# EAGLE board 405_led_jetracer020000S (EAGLE 9.6.2)
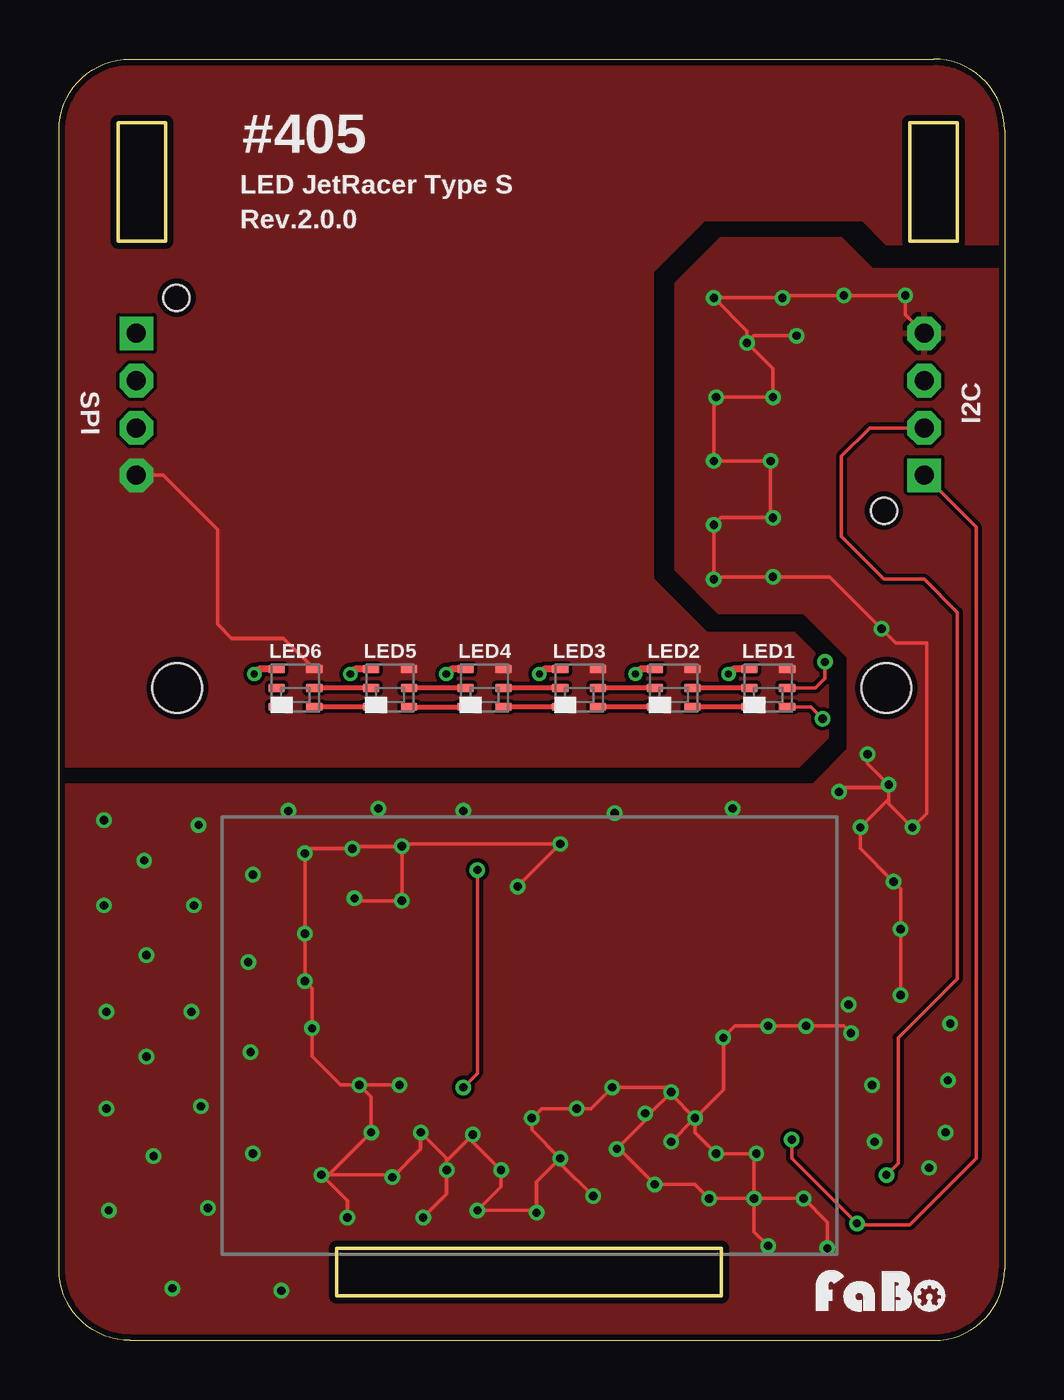
[diagram p0: board, top side]
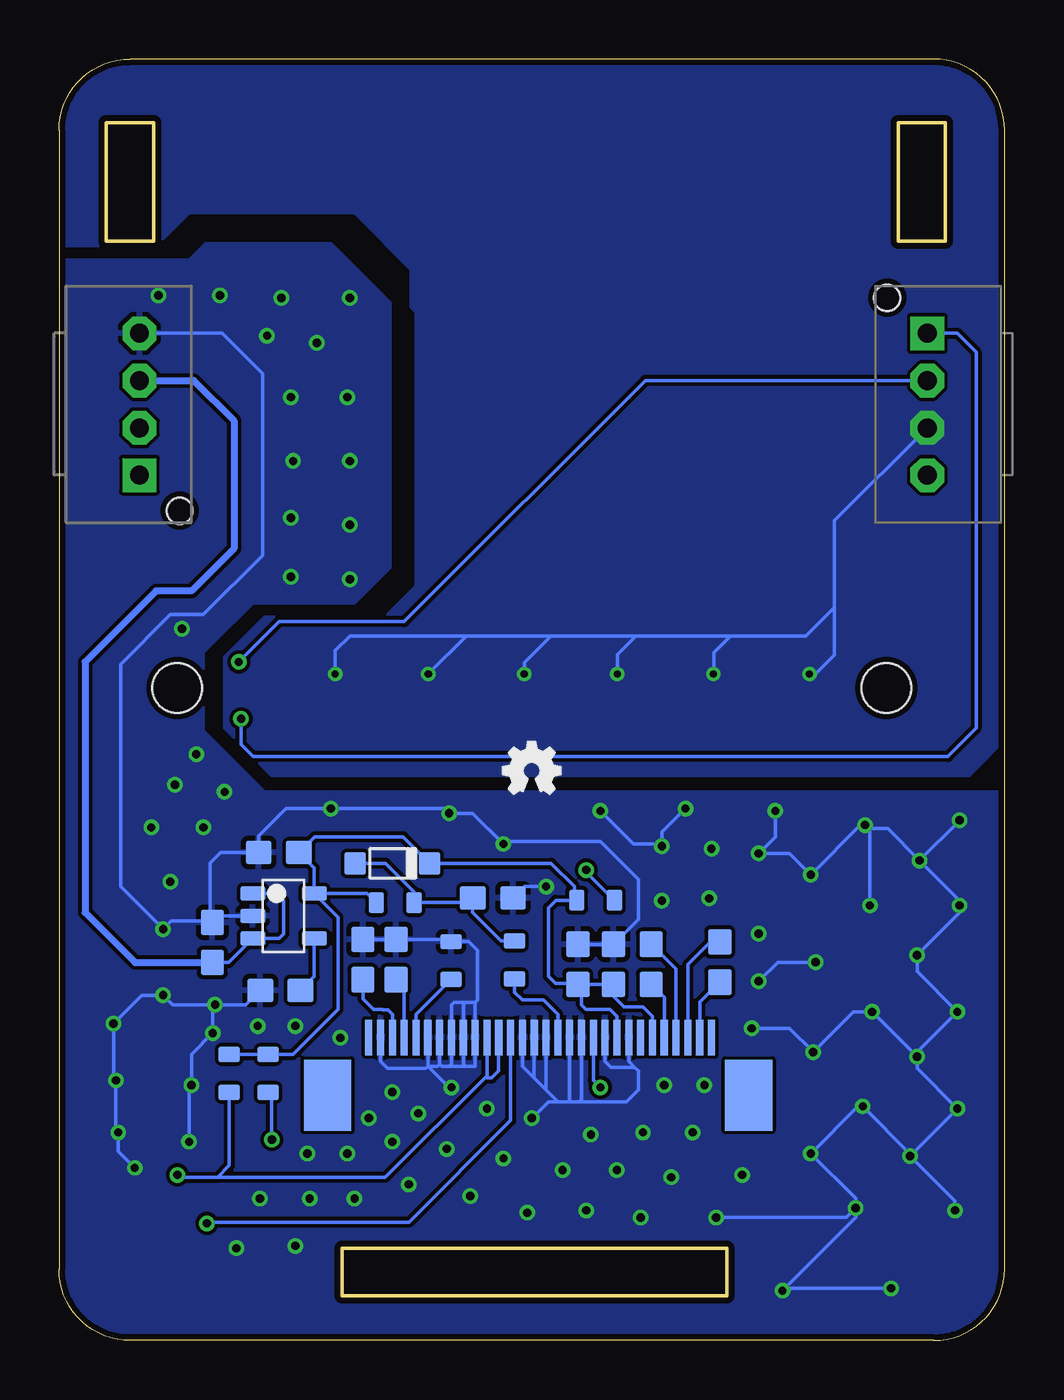
[diagram p1: board, bottom side, seen from below]

Size 40 x 54.2 mm. Coordinates in mm from the lower left corner, seen from the top.
Outline: 3,0 37,0 arc90 40,3 40,51.2 arc90 37,54.2 3,54.2 arc90 0,51.2 0,3 arc90 3,0
Outline: 11.75,1.89 28.03,1.89 28.03,3.9 11.75,3.9 11.75,1.89
Outline: 2.5,51.5 4.5,51.5 4.5,46.5 2.5,46.5 2.5,51.5
Outline: 36,51.5 38,51.5 38,46.5 36,46.5 36,51.5
Copper layers (1*16): Top 0.035mm / dielectric 1.6mm / Bottom 0.035mm
Design rules "PCBway": minimum track width 6mil, minimum drill 12mil, track to track 6mil, track to pad 6mil, pad to pad 6mil, via to via 6mil, smd to smd 6mil, copper to edge 10mil, drill to drill 10mil, minimum pad ring 10mil, minimum via ring 6mil, stop-mask expansion 2mil, vias tented up to drill 100mil, thermal gap 8mil
Holes 2.1 mm at 5,27.6 35,27.6
bRestrict: 8 lines

## Footprints (pad centres in the part's own frame; a part is rotated, then mirrored left to right if it is on the bottom)
0603 = smd 1.1 x 1: 1 -0.85,0; 2 0.85,0
1N4148W = smd 0.9 x 0.95: ANODE 0,0; CATHODE 3.15,0
FABO_BRICK_I2C_B04B-PASK-1 = drill 0.8 pad 1.422 octagon: GND -3,0; SDA 1,0; VCC -1,0 | drill 0.8 pad 1.422 square: SCL 3,0 | hole 1.1: 4.5,1.7
SOT-23-5 = smd 0.6 x 1.05: 1 -0.95,-1.3; 2 0,-1.3; 3 0.95,-1.3; 4 0.95,1.3; 5 -0.95,1.3
APA102_2020 = smd 0.7 x 0.35: CKI 0.8,0; CKO -0.8,0; GND 0.8,0.8; SDI 0.8,-0.8; SDO -0.8,-0.8; VCC -0.8,0.8
0603' = smd 0.65 x 0.9: 1 -0.8,0; 2 0.8,0
SPI-B04B-PASK-1 = drill 0.8 pad 1.422 octagon: CI 1,1.27; GND -3,1.27; VCC -1,1.27 | drill 0.8 pad 1.422 square: DI 3,1.27 | hole 1.1: 4.5,2.97
ER-CON30HT-1 = smd 0.3 x 1.5 bottom: 1 7,-0.23; 2 6.5,-0.23; 3 6,-0.23; 4 5.5,-0.23; 5 5,-0.23; 6 4.5,-0.23; 7 4,-0.23; 8 3.5,-0.23; 9 3,-0.23; 10 2.5,-0.23; 11 2,-0.23; 12 1.5,-0.23; 13 1,-0.23; 14 0.5,-0.23; 15 0,-0.23; 16 -0.5,-0.23; 17 -1,-0.23; 18 -1.5,-0.23; 19 -2,-0.23; 20 -2.5,-0.23; 21 -3,-0.23; 22 -3.5,-0.23; 23 -4,-0.23; 24 -4.5,-0.23; 25 -5,-0.23; 26 -5.5,-0.23; 27 -6,-0.23; 28 -6.5,-0.23; 29 -7,-0.23; 30 -7.5,-0.23 | smd 2 x 3 bottom: 31 -9.07,-2.67; 32 8.74,-2.67

## Placement (x,y rotation side)
C4  1uF  [0603]  14.95,15.91 90 bottom
C5  1uF  [0603]  12.05,16.01 270 bottom
C6  1uF  [0603]  18.05,15.91 270 bottom
C7  1uF  [0603]  16.55,15.91 270 bottom
C8  10uF  [0603]  27.15,16.11 270 bottom
C9  10uF  [0603]  25.75,16.11 270 bottom
C11  10uF  [0603]  21.65,18.71 180 bottom
C22  4.7uF  [0603]  30.7,20.64 0 bottom
C23  0.01uF  [0603]  30.64,14.81 0 bottom
C24  1uF  [0603]  33.52,16.84 270 bottom
D1  1N4148  [1N4148W]  27.47,20.18 0 bottom
I2C  [FABO_BRICK_I2C_B04B-PASK-1]  36.6,39.6 270 bottom
IC4  [SOT-23-5]  30.5,17.95 270 bottom
LED1  [APA102_2020]  30,27.6 0 top
LED2  [APA102_2020]  26,27.6 0 top
LED3  [APA102_2020]  22,27.6 0 top
LED4  [APA102_2020]  18,27.6 0 top
LED5  [APA102_2020]  14,27.6 0 top
LED6  [APA102_2020]  10,27.6 0 top
LOGO1  [LOGO_OSHW_S_BOTTOM]  20,24.1 0 top
LOGO2  [LOGO_FABO_S]  34.81,1.07 0 top
R7  DFN  [0603']  31.16,11.29 270 bottom
R8  100  [0603']  20.73,16.09 270 bottom
R9  DFN  [0603']  32.8,11.29 270 bottom
R22  10K  [0603']  17.3,18.62 0 bottom
R23  10K  [0603']  25.78,18.52 0 bottom
R35  390K  [0603']  23.41,16.07 90 bottom
SPI  [SPI-B04B-PASK-1]  2,39.6 90 bottom
U1  [ER-CON30HT-1]  19.9,13.04 0 top

## Library data of the parts
C4-C9 C11 C22-C24 = FaBo-Capacitor
D1 = FaBo-Diode
I2C = FaBo-Template
IC4 = FaBo-Supply
LED1-LED6 = FaBo-LED
LOGO1 LOGO2 = FaBo-Logo
R7-R9 R22 R23 R35 = FaBo-Resistors
SPI = FaBo-Connetor
U1 = FaBo-Display

## Nets
0: C6.1 C7.1 C8.1 C9.1 C11.1 C22.1 C23.1 C24.1 I2C.GND IC4.2 R35.2 U1.2 U1.6 U1.7 U1.8 U1.9 U1.10 U1.14 U1.15 U1.16 U1.18 U1.19 U1.21 U1.23
3V3: C6.2 C7.2 C22.2 D1.CATHODE IC4.5 R7.1 R9.1 R22.1 R23.1 U1.22 U1.25
5V: LED1.VCC LED2.VCC LED3.VCC LED4.VCC LED5.VCC LED6.VCC SPI.VCC
5V_I2C: C24.2 I2C.VCC IC4.1 IC4.3
CI: LED1.CKI SPI.CI
CI1: LED1.CKO LED2.CKI
CI2: LED2.CKO LED3.CKI
CI3: LED3.CKO LED4.CKI
CI4: LED4.CKO LED5.CKI
CI5: LED5.CKO LED6.CKI
DI: LED1.SDI SPI.DI
DI1: LED1.SDO LED2.SDI
DI2: LED2.SDO LED3.SDI
DI3: LED3.SDO LED4.SDI
DI4: LED4.SDO LED5.SDI
DI5: LED5.SDO LED6.SDI
GND: LED1.GND LED2.GND LED3.GND LED4.GND LED5.GND LED6.GND SPI.GND
N$2: C23.2 IC4.4
N$16: C4.2 U1.27
N$21: C4.1 U1.26
N$22: C5.1 U1.28
N$23: C5.2 U1.29
N$24: R35.1 U1.5
N$25: C9.2 U1.4
N$26: C8.2 U1.3
N$27: R8.2 U1.17
N$28: C11.2 D1.ANODE R8.1 R23.2
N$50: R22.2 U1.20
SCL: I2C.SCL R7.2 U1.13
SDA: I2C.SDA R9.2 U1.11 U1.12

## Tracks (layer width: path | path; a pad name or v marks a point on that pad's centre or on a via)
0  (via drill 0.35)
  Top 0.152: v19.4,19.2 v21.2,21 14.72,21 14.5,20.78 | v11.1,7 12.2,5.9 v12.2,5.2 | 14.5,20.78 v14.5,20.9 12.5,20.9 v12.4,20.8 10.6,20.8 v10.4,20.6 v10.4,17.2 v10.4,15.2 10.7,14.9 v10.7,13.2 10.7,12.01 11.91,10.8 v12.7,10.8 | 14.5,20.78 v14.5,18.6 12.6,18.6 v12.5,18.7 | v12.7,10.8 v14.4,10.8 | v12.7,10.8 13.2,10.3 v13.2,8.8 11.4,7 v11.1,7 | v11.1,7 14,7 v14.1,6.9 15.3,8.1 v15.3,8.8 16.4,7.7 v16.4,7.2 | v16.4,7.2 16.4,6.2 v15.4,5.2 | v16.4,7.2 16.4,7.6 v17.5,8.7 17.5,8.4 v18.7,7.2 18.7,6.5 v17.7,5.5 20.1,5.5 v20.2,5.4 20.2,6.7 v21.2,7.7 | v21.2,7.7 20,8.9 v20,9.4 20.4,9.8 v21.9,9.8 22.5,9.8 v23.4,10.7 25.7,10.7 v25.9,10.5 | v21.2,7.7 21.2,7.5 v22.6,6.1 | v25.9,10.5 25,9.6 v24.8,9.6 24.8,9.3 v23.6,8.1 23.7,8.1 v25.2,6.6 26.9,6.6 v27.5,6 v29.4,6 | v29.4,6 v31.5,6 32.5,5 v32.5,3.9 | v30,4 29.4,4.6 v29.4,6 | v29.4,6 29.4,7.8 v29.5,7.9 v27.8,7.9 26.9,8.8 26.9,9.3 | 26.9,9.3 v26.9,9.4 | v26.9,9.4 25.9,10.4 v25.9,10.5 | v25.9,8.4 26.8,9.3 26.9,9.3 | v26.9,9.4 28.1,10.6 v28.1,12.8 28.6,13.3 v30,13.3 v31.6,13.3 33.2,13.3 v33.5,13 | v35.6,14.6 v35.6,17.4 35.6,19.1 v35.3,19.4 33.9,20.8 v33.9,21.7 35.1,22.9 | I2C.GND 35.8,43.4 v35.8,44.2 v33.2,44.2 30.7,44.2 v30.6,44.1 v27.7,44.1 29.1,42.7 v29.1,42.2 | v29.1,42.2 29.4,42.5 v31.2,42.5 | v29.1,42.2 30.2,41.1 v30.2,39.9 v27.8,39.9 27.7,39.8 v27.7,37.2 v30.1,37.2 30.1,34.9 v30.2,34.8 28,34.8 v27.7,34.5 v27.7,32.2 27.8,32.3 v30.2,32.3 32.6,32.3 v34.8,30.1 35.4,29.5 36.7,29.5 36.7,22.3 v36.1,21.7 35.1,22.7 35.1,22.9 | 35.1,23.4 v35.1,23.5 34.2,24.4 v34.2,24.8 | 35.1,23.4 35.1,22.9 | v33,23.2 33.2,23.4 35.1,23.4
  Bottom 0.152: C6.1 C7.1 15.5,17.81 15.5,19.5 17.1,21.1 21.1,21.1 v21.2,21 22.5,22.3 v23.5,22.3 23.7,22.5 v28.5,22.5 30.4,22.5 31.55,21.34 C22.1 33.16,20.64 33.6,20.2 33.6,18.2 33.3,17.9 | 22.4,14.3 22.3,14.4 22.3,16.5 22.67,16.87 R35.2 23.5,16.96 C9.1 C8.1 27.25,17.06 27.4,17.06 | 22.4,14.3 U1.10 22.4,11.6 22.8,11.6 | 22.8,14.3 22.9,14.2 U1.9 22.9,11.7 22.8,11.6 | 22.8,14.3 22.4,14.3 | 22.8,14.3 23.3,14.3 23.4,14.2 U1.8 23.4,11.7 23.5,11.6 | U1.7 23.9,11.7 | 23.9,11.7 23.8,11.6 23.5,11.6 | U1.6 24.4,11.6 | 24.4,11.6 24,11.6 23.9,11.7 | v19.4,19.2 20.31,19.2 C11.1 | 23.5,11.6 22.8,11.6 | U1.23 15.9,11.8 15.65,11.55 | 15.65,11.55 15.5,11.4 15.5,10.6 16,10.1 18,10.1 | 18,10.1 18.4,10.1 | 19.9,11.1 U1.15 | U1.18 18.4,10.1 | U1.19 17.9,10.2 18,10.1 | U1.21 16.9,11.8 16.65,11.55 15.65,11.55 | IC4.2 33.24,17.95 33.3,17.9 | 33.3,17.9 33.45,17.75 | 33.45,17.75 C24.1 | C23.1 32.1,14.2 v33.4,14.2 33.5,14.2 | 18.4,10.1 18.9,10.1 | 18.9,10.1 19.4,10.6 | 19.4,10.6 19.9,11.1 | U1.16 19.4,10.6 | 19.9,11.1 20.4,11.6 U1.14 | 24.4,11.6 23.5,10.7 v23.4,10.7 | 18.9,10.1 19.3,10.1 v20,9.4 | U1.2 26.4,11.8 26.1,11.5 24.5,11.5 24.4,11.6 | 33.5,14.2 35.2,14.2 v35.6,14.6 36.5,14.6 v37.7,13.4 37.7,11.1 v37.6,11 37.6,8.9 v37.5,8.8 37.5,8 v36.8,7.3 | 33.45,17.75 35.25,17.75 v35.6,17.4 37.4,19.2 37.4,28.6 35.3,30.7 33.9,30.7 31.4,33.2 31.4,40.9 33.1,42.6 I2C.GND | v34.5,8.4 34.5,10.7 v34.4,10.8 34.4,12.1 v33.5,13 33.5,14.2 | v4.8,2.2 9.3,2.2 v9.4,2.1 6.3,5.2 v6.3,5.6 | v12.2,5.2 6.7,5.2 v6.3,5.6 | v6.3,5.6 6.3,6 v8.2,7.9 6.2,9.9 v6,9.9 4,7.9 | 4,7.9 v4,7.8 2.1,5.9 v2.1,5.5 | 4,7.9 3.9,7.9 v2,9.8 3.7,11.5 v3.7,12 | v3.7,12 3.7,12.2 v2,13.9 3.7,15.6 v3.7,16.3 1.9,18.1 v1.9,18.4 1.9,18.6 v3.6,20.3
  Bottom 0.152: v3.6,20.3 v1.9,22 | v3.7,12 v5.6,13.9 6.4,13.9 v8.1,12.2 9.1,13.2 v10.7,13.2 | v8,16 9.6,16 v10.4,15.2 | v5.7,18.4 5.7,21.6 5.75,21.65 | 5.75,21.65 v5.9,21.8 6.1,21.8 v8.2,19.7 9.1,20.6 v10.4,20.6 9.7,21.3 v9.7,22.4 | v3.6,20.3 4.95,21.65 5.75,21.65 | v13.5,22.5 14.5,21.5 14.5,21 | 14.5,21 v14.5,20.9 | v17.1,22.4 15.7,21 14.5,21
  pour Bottom: -4,1.9 -4,20.3 -1.1,23.2 31.3,23.2 33.9,25.8 33.9,29.1 33.5,29.5 31.8,31.2 27.5,31.2 26,32.7 26,43.7 26,43.9 28.5,46.4 33.8,46.4 34.5,45.7 40.5,45.7 40.6,45.6 41.7,44.5 41.7,0.4 38.3,-3 -0.9,-3 -4,0.1
  pour Top: -6.4,22.3 -5.2,23.5 31.9,23.5 33.4,25 33.4,28.9 31.5,30.8 27.9,30.8 26.1,32.6 26.1,44.7 28,46.6 33.1,46.6 34.4,45.3 42.1,45.3 43.4,44 43.4,2.4 39.2,-1.8 -3.9,-1.8 -6.4,0.7
3V3
  Bottom 0.152: U1.25 14.9,13.7 15.3,14.1 16.1,14.1 16.55,14.55 C7.2 17.9,15.06 | 17.9,15.06 C6.2 18.09,15.1 19,15.1 19.3,15.4 19.3,18.3 18.98,18.62 18.2,18.62 | U1.22 16.4,13.7 16.7,14 17.7,14 17.9,14.2 17.9,15.06 | 18.2,18.62 R22.1 | 18.2,18.62 18.2,19.2 19.18,20.18 D1.CATHODE 25.44,21.3 29.19,21.3 C22.2 29.2,19.98 IC4.5 | R23.1 26.96,18.91 IC4.5 | R9.1 R7.1 30.11,12.1 28.2,14 28.2,17.9 IC4.5
5V  (via drill 0.3)
  Top 0.305: LED1.VCC 28.53,28.4 v28.32,28.19 | LED2.VCC 24.6,28.4 v24.38,28.19 | LED3.VCC 20.53,28.4 v20.32,28.19 | LED4.VCC 16.59,28.4 v16.38,28.19 | LED5.VCC 12.53,28.4 v12.32,28.19 | LED6.VCC 8.47,28.4 v8.26,28.19
  Bottom 0.152: SPI.VCC 7.2,34.67 7.2,31 | 7.2,31 7.2,29 8.01,28.19 v8.26,28.19 | v12.32,28.19 12.3,28.21 12.3,29.1 11.6,29.8 | 7.2,31 8.4,29.8 11.6,29.8 | v16.38,28.19 16.38,29.02 15.6,29.8 | 15.6,29.8 11.6,29.8 | v20.32,28.19 20.32,28.68 19.2,29.8 | 19.2,29.8 15.6,29.8 | v24.38,28.19 22.77,29.8 | 22.77,29.8 19.2,29.8 | v28.32,28.19 28.32,29.18 27.7,29.8 22.77,29.8
  pour Bottom (no thermals): -2.7,53.6 2.1,58.4 39.6,58.4 41.7,56.3 41.7,47.2 40.8,46.3 37.5,46.3 35.9,46.3 34.5,47.7 27.5,47.7 27.4,47.6 25.1,45.3 25.1,43.7 24.9,43.5 24.9,31.9 26.2,30.6 27.4,30.6 31.3,30.6 33,28.9 33,25.9 31,23.9 1.5,23.9 -0.2,25.6 -2.7,28.1
5V_I2C
  Bottom 0.152: IC4.1 30.8,18.9 30.5,18.6 30.5,17.2 30.7,17 IC4.3 32.83,15.98 C24.2
  Bottom 0.305: I2C.VCC 34.3,40.6 32.6,38.9 32.6,33.5 34.4,31.7 35.9,31.7 38.9,28.7 38.9,18.1 36.78,15.98 C24.2
CI  (via drill 0.35)
  Top 0.152: v32.4,28.7 32.4,28 32,27.6 LED1.CKI
  Bottom 0.152: SPI.CI 15.2,40.6 25.4,30.4 30.7,30.4 v32.4,28.7
CI1
  Top 0.203: LED1.CKO LED2.CKI
CI2
  Top 0.203: LED2.CKO LED3.CKI
CI3
  Top 0.203: LED3.CKO LED4.CKI
CI4
  Top 0.203: LED4.CKO LED5.CKI
CI5
  Top 0.203: LED5.CKO LED6.CKI
DI  (via drill 0.35)
  Top 0.152: v32.3,26.3 31.8,26.8 LED1.SDI
  Bottom 0.152: SPI.DI 2,42.6 1.2,41.8 1.2,25.9 2.4,24.7 31.8,24.7 32.3,25.2 v32.3,26.3
DI1
  Top 0.203: LED1.SDO LED2.SDI
DI2
  Top 0.203: LED2.SDO LED3.SDI
DI3
  Top 0.203: LED3.SDO LED4.SDI
DI4
  Top 0.203: LED5.SDI LED4.SDO
DI5
  Top 0.203: LED5.SDO LED6.SDI
GND
  Top 0.152: SPI.GND 4.4,36.6 6.7,34.3 6.7,30.3 7.3,29.7 9.5,29.7 LED6.GND
  pour Top (no thermals): -4.7,56.7 -2.8,58.6 39.4,58.6 43.4,54.6 43.4,48.3 41.5,46.4 35,46.4 34,47.4 27.3,47.4 25.1,45.2 25.1,32.2 27.4,29.9 31.1,29.9 32.5,28.5 32.5,25.5 31.3,24.3 -3.3,24.3 -4.7,25.7
N$2
  Bottom 0.152: C23.2 29.2,15.39 IC4.4
N$16
  Bottom 0.152: U1.27 13.9,15.71 C4.2
N$21
  Bottom 0.152: U1.26 14.4,14.51 C4.1
N$22
  Bottom 0.152: U1.28 13.4,15.9 12.44,16.86 C5.1
N$23
  Bottom 0.152: C5.2 12.9,14.31 U1.29
N$24
  Bottom 0.152: R35.1 24.9,13.79 U1.5
N$25
  Bottom 0.152: U1.4 25.4,14.91 C9.2
N$26
  Bottom 0.152: U1.3 25.9,13.8 26.08,13.98 26.29,13.98 26.3,14 26.7,14 27.15,14.45 C8.2
N$27
  Bottom 0.152: U1.17 18.9,13.8 19.5,14.4 20.4,14.4 20.73,14.73 R8.2
N$28
  Bottom 0.152: R8.1 21.3,16.89 22.5,18.1 C11.2 | C11.2 | C11.2 22.68,18.52 R23.2 24.98,18.98 26.18,20.18 D1.ANODE
N$50  (via drill 0.35)
  Top 0.152: v17.7,19.9 17.7,11.3 v17.1,10.7
  Bottom 0.152: U1.20 17.4,11 v17.1,10.7 | v17.7,19.9 17.7,19.82 R22.2
SCL  (via drill 0.35)
  Top 0.152: v31,8.5 31,7.7 v33.75,4.95 33.8,4.9 36,4.9 38.8,7.7 38.8,34.4 I2C.SCL
  Bottom 0.152: v31,8.5 31,10.34 R7.2 | U1.13 20.9,9.3 25.2,5 33.7,5 v33.75,4.95
SDA  (via drill 0.35)
  Top 0.152: I2C.SDA 34.3,38.6 33.1,37.4 33.1,34 34.9,32.2 36.6,32.2 38,30.8 38,15.3 35.5,12.8 35.5,7.5 v35,7
  Bottom 0.152: 33.3,6.9 26.2,6.9 21.9,11.2 | 21.9,11.2 21.9,11.1 21.7,11.1 21.4,11.4 U1.12 | 21.9,11.2 U1.11 | R9.2 32.8,7.39 33.3,6.9 | v35,7 34.9,6.9 33.3,6.9

## Text on the board
tPlace: #405 | LED JetRacer Type S | Rev.2.0.0
Document: #405 LED JetRacer Type S Rev2.0.0 / 2022/2/20